# Altium PCB 88路激光器工程.PcbDoc (part 2 of 2)
Units mm, origin at the board's own origin, x right, y up, seen from the top; angles counter-clockwise.
Board outline 290.3 x 80 mm, 2 copper layers (Top Layer, Bottom Layer), stack 1.4 mm thick; 159 components, 203 nets, 686 pads, 305 vias.
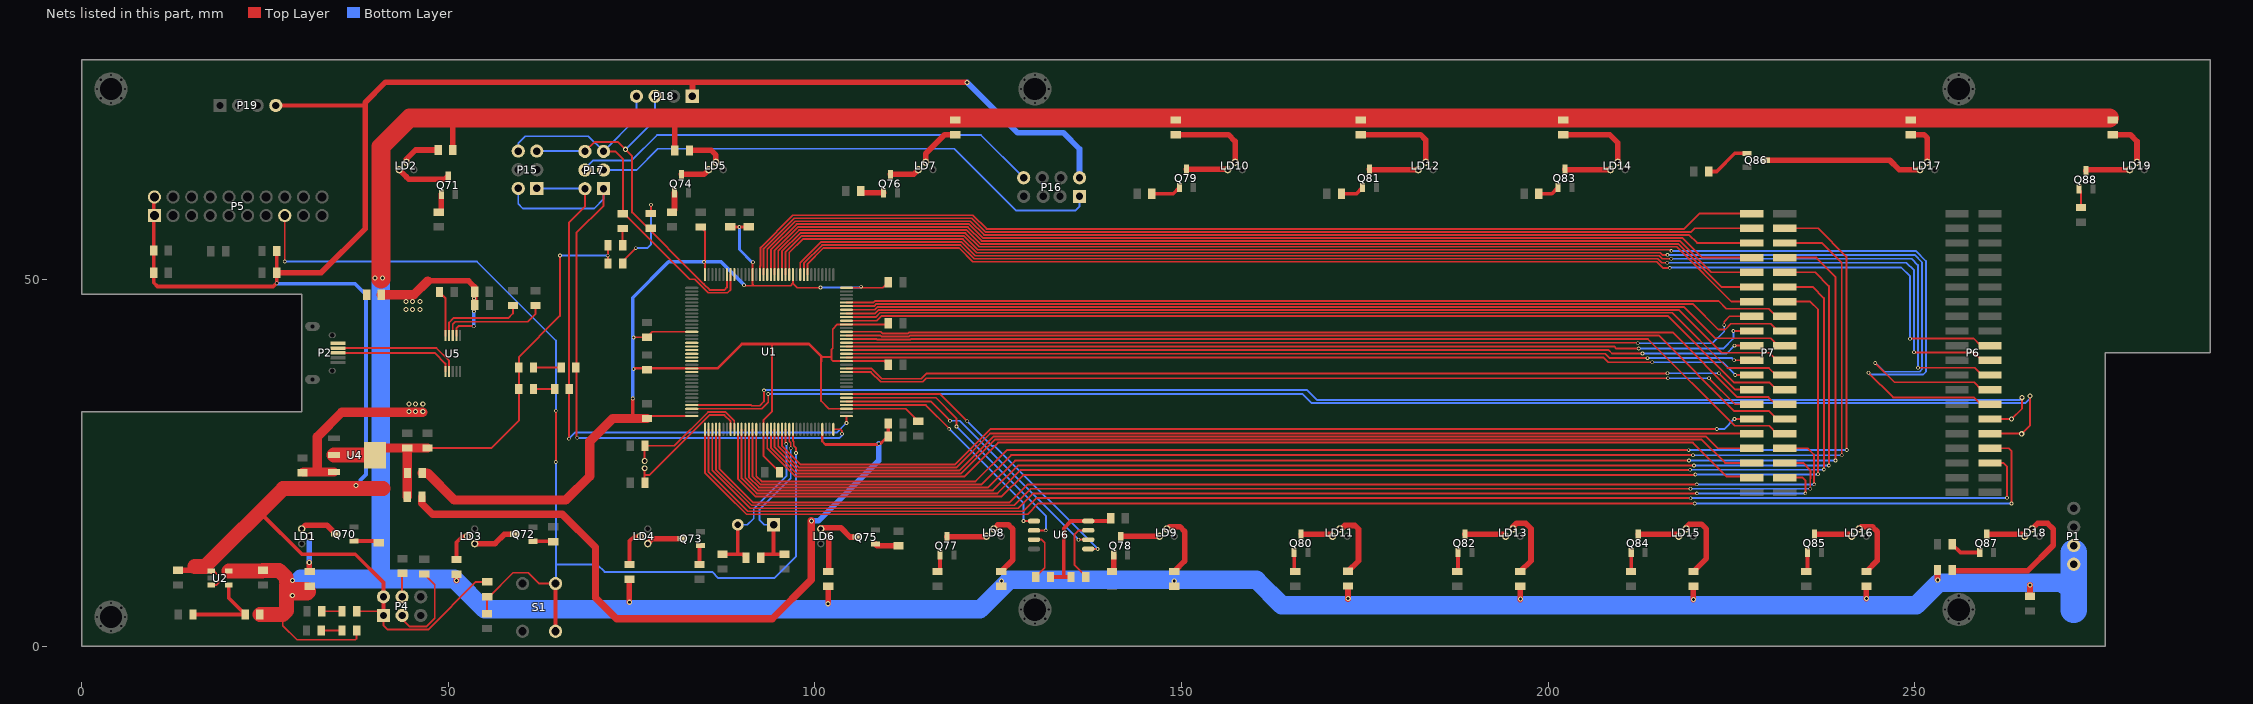
[diagram p2: the nets of this part, all layers, seen from the top]

## Via types
v1: diameter 0.5, hole 0.3, Top Layer to Bottom Layer, tented both sides, 216 vias
v2: diameter 0.7, hole 0.4, Top Layer to Bottom Layer, tented both sides, 87 vias
v3: diameter 1.27, hole 0.711, Top Layer to Bottom Layer, tented both sides, 2 vias

## Nets (pads, with @x,y where several pads share a name; then routed paths per layer and width w, separated by ;. In a path a pad name is that pad's centre, name@x,y a point inside that pad or via, vN(x,y) a via of type N, cw(c..) or ccw(c..) an arc to the next point about the centre after c; other vN are vias at no path point) (continued)
LD43: P6.20 U1.80 | length 174.2
  Top Layer w0.254: U1.80@99.001,50.69 99.001,52.175 101.14,54.313 119.685,54.313 121.554,52.444 214.78,52.444 215.624,51.6 v1(216.575,51.6) ; v1@249.375,41.975 258.025,41.975 259,41 P6.20@260.25,41
  Bottom Layer w0.254: v1(216.575,51.6) 216.629,51.654 248.146,51.654 249.35,50.45 v1(249.35,41.925)
LD44: P6.22 U1.81 | length 177.3
  Top Layer w0.254: U1.81@98.501,50.69 98.501,52.25 100.971,54.72 119.853,54.72 121.723,52.851 214.948,52.851 215.499,52.3 v1(216.225,52.3) ; v1@249.925,40.05 258.05,40.05 259.1,39 P6.22@260.25,39
  Bottom Layer w0.254: v1(216.225,52.3) 248.85,52.3 249.9,51.25 249.879,51.229 249.879,40.104 v1(249.875,40.1)
LD45: P6.24 U1.82 | length 180.8
  Top Layer w0.254: U1.82@98.001,50.69 98.001,52.324 100.803,55.126 120.022,55.126 121.891,53.257 215.116,53.257 215.528,52.846 v1(216.771,52.846) ; v1(250.425,37.975) 258.175,37.975 259.15,37 P6.24@260.25,37
  Bottom Layer w0.254: v1(216.771,52.846) 249.554,52.846 250.425,51.975 v1(250.425,37.975)
LD46: P6.26 U1.85 | length 198.3
  Top Layer w0.254: U1.85@96.501,50.69 96.501,53.701 98.333,55.533 120.19,55.533 122.059,53.663 215.285,53.663 215.573,53.375 v1(216.275,53.375) ; v1(244.6,38.625) 247.225,36 258.075,36 259.075,35 P6.26@260.25,35
  Bottom Layer w0.254: v1(216.275,53.375) 249.975,53.375 250.975,52.375 250.975,37.776 250.644,37.446 245.804,37.446 v1@244.613,38.637
LD47: P6.28 U1.86 | length 202.5
  Top Layer w0.254: U1.86@96.001,50.69 96.001,53.776 98.164,55.939 120.358,55.939 122.228,54.07 216.655,54.07 v1(216.8,53.925) ; v1(243.675,37.3) 247.025,33.95 258.05,33.95 259,33 P6.28@260.25,33
  Bottom Layer w0.254: v1(216.8,53.925) 250.125,53.925 251.521,52.529 251.521,37.446 251.114,37.039 243.936,37.039 v1(243.675,37.3)
LD48: P6.30 U1.141 | length 190.3
  Top Layer w0.254: U1.141@83.202,32.89 91.315,32.89 91.399,32.806 92.456,32.806 93.054,33.404 93.054,34.896 v1(93.05,34.9) ; P6.30@260.25,31 v2@263.2,31 ; v2(263.175,30.975) v2@263.2,31 ; v2(264.625,33.9) 264.625,32.425 v2@263.2,31
  Bottom Layer w0.254: v1(93.05,34.9) 93.079,34.929 167.125,34.929 168.493,33.561 264.286,33.561 v2@264.525,33.8
LD49: P6.32 U1.142 | length 195.1
  Top Layer w0.254: U1.142@83.202,32.39 83.212,32.4 92.75,32.4 93.625,33.275 v1(93.625,34.4) ; P6.32@260.25,29 v2@264.6,29 ; v2(264.575,28.975) v2@264.6,29 ; v2(265.725,34.15) 265.725,30.125 v2@264.6,29
  Bottom Layer w0.254: v1(93.625,34.4) 166.525,34.4 167.77,33.155 265.055,33.155 265.725,33.825 v2(265.725,34.15)
LD50: P6.34 U1.1 | length 197.2
  Top Layer w0.254: U1.1@85.001,29.59 85.001,23.674 87.8,20.875 90.671,18.005 129,18.005 130.47,19.475 v1(219.975,19.475) ; P6.34@260.25,27 262.8,27 263.2,26.6 v1@263.2,19.55
  Bottom Layer w0.254: v1(219.975,19.475) v1(263.175,19.475)
LD51: P6.36 U1.2 | length 192.7
  Top Layer w0.254: U1.2@85.501,29.59 85.501,23.749 90.839,18.411 128.425,18.411 130.214,20.2 v1(219.425,20.2) ; P6.36@260.25,25 262.075,25 262.575,24.5 v1(262.575,20.25)
  Bottom Layer w0.254: v1(219.425,20.2) 262.525,20.2 v1(262.575,20.25)
LD52: P7.3 U1.3 | length 162.4
  Top Layer w0.254: U1.3@86.001,29.59 86.001,23.999 91.183,18.817 127.75,18.817 129.783,20.85 v1(220.275,20.85) ; P7.3@232.25,23 234.702,23 235.075,22.627 v1(235.075,20.85)
  Bottom Layer w0.254: v1(220.275,20.85) v1@235.05,20.85
LD53: P7.5 U1.4 | length 164.1
  Top Layer w0.254: U1.4@86.501,29.59 86.501,24.074 91.351,19.224 127.175,19.224 129.426,21.475 v1(219.4,21.475) ; P7.5@232.25,25 234.775,25 235.75,24.025 235.75,22.875 235.746,22.871 v1@235.746,21.504
  Bottom Layer w0.254: v1(219.4,21.475) v1(235.725,21.475)
LD54: P7.7 U1.5 | length 166
  Top Layer w0.254: U1.5@87.001,29.59 87.001,24.149 91.52,19.63 126.575,19.63 129.02,22.075 v1(220.25,22.075) ; P7.7@232.25,27 235.4,27 236.25,26.15 v1@236.25,22.1
  Bottom Layer w0.254: v1(220.25,22.075) v1(236.275,22.075)
LD55: P7.9 U1.58 | length 133.3
  Top Layer w0.254: U1.58@104.301,41.89 108.436,41.89 108.475,41.851 113.036,41.851 113.075,41.89 213.61,41.89 225.425,30.075 230.125,30.075 231.2,29 P7.9@232.25,29
LD56: P7.11 U1.59 | length 132.8
  Top Layer w0.254: U1.59@104.301,42.39 108.912,42.39 109.044,42.258 112.868,42.258 113,42.39 215.085,42.39 225.4,32.075 230.125,32.075 231.2,31 P7.11@232.25,31
LD57: P7.13 U1.60 | length 132.2
  Top Layer w0.254: U1.60@104.301,42.89 108.987,42.89 109.213,42.664 112.7,42.664 112.832,42.796 216.955,42.796 225.776,33.975 230.025,33.975 231,33 P7.13@232.25,33
LD58: P7.15 U1.63 | length 132.4
  Top Layer w0.254: U1.63@104.301,44.39 108.44,44.39 109.1,45.05 216.3,45.05 225.4,35.95 230.2,35.95 231.15,35 P7.15@232.25,35
LD59: P7.17 U1.64 | length 131.7
  Top Layer w0.254: U1.64@104.301,44.89 108.29,44.89 108.875,45.475 216.925,45.475 224.45,37.95 230.1,37.95 231.05,37 P7.17@232.25,37
LD60: P7.19 U1.65 | length 131
  Top Layer w0.254: U1.65@104.301,45.39 108.215,45.39 108.707,45.881 217.819,45.881 223.675,40.025 230.175,40.025 231.2,39 P7.19@232.25,39
LD61: P7.21 U1.66 | length 130.3
  Top Layer w0.254: U1.66@104.301,45.89 108.141,45.89 108.538,46.288 218.462,46.288 222.75,42 230.35,42 231.35,41 P7.21@232.25,41
LD62: P7.23 U1.67 | length 130.2
  Top Layer w0.254: U1.67@104.301,46.39 108.066,46.39 108.37,46.694 219.706,46.694 223.2,43.2 224.15,43.2 224.925,43.975 230.325,43.975 231.3,43 P7.23@232.25,43
LD63: P7.25 U1.68 | length 128.9
  Top Layer w0.254: U1.68@104.301,46.89 107.991,46.89 ; 107.975,46.874 107.991,46.89 ; P7.25@232.25,45 231.075,45 230.05,46.025 224.3,46.025 223.224,47.101 108.202,47.101 107.991,46.89
LD64: P7.27 U1.10 | length 183.8
  Top Layer w0.254: U1.10@89.501,29.59 89.501,22.823 91.882,20.443 125.475,20.443 128.382,23.35 v1@220.1,23.35 ; P7.27@232.25,47 235.725,47 236.8,45.925 v1(236.8,23.45)
  Bottom Layer w0.254: v1(220.075,23.425) 236.775,23.425 v1(236.8,23.45)
LD65: P7.29 U1.11 | length 185.8
  Top Layer w0.254: U1.11@90.001,29.59 90.001,22.898 92.05,20.849 124.9,20.849 128.101,24.05 v1@219.325,24.05 ; P7.29@232.25,49 236.075,49 237.6,47.475 v1(237.6,24.1)
  Bottom Layer w0.254: v1(219.35,24.075) 237.575,24.075 v1(237.6,24.1)
LD66: P7.31 U1.12 | length 187.8
  Top Layer w0.254: U1.12@90.501,29.59 90.501,22.973 92.218,21.256 124.275,21.256 127.669,24.65 v1(219.875,24.65) ; P7.31@232.25,51 236.4,51 238.275,49.125 v1(238.275,24.65)
  Bottom Layer w0.254: v1(219.875,24.65) v1(238.275,24.65)
LD67: P7.33 U1.13 | length 189.9
  Top Layer w0.254: U1.13@91.001,29.59 91.001,23.048 92.387,21.662 123.625,21.662 127.288,25.325 v1(219.2,25.325) ; P7.33@232.25,53 236.575,53 239.175,50.4 v1(239.175,25.325)
  Bottom Layer w0.254: v1(219.2,25.325) v1(239.175,25.325)
LD68: P7.35 U1.14 | length 192.2
  Top Layer w0.254: U1.14@91.501,29.59 91.501,23.124 92.556,22.069 122.75,22.069 126.756,26.075 v1@219.75,26.075 ; P7.35@232.25,55 237.3,55 240.025,52.275 v1(240.025,26.05)
  Bottom Layer w0.254: v1(219.75,26.05) v1(240.025,26.05)
LD69: P7.37 U1.15 | length 193.9
  Top Layer w0.254: U1.15@92.001,29.59 92.001,23.198 92.725,22.475 121.9,22.475 126.175,26.75 v1(219.15,26.75) ; P7.37@232.25,57 236.825,57 240.675,53.15 240.675,26.825 v1(240.725,26.775)
  Bottom Layer w0.254: v1(219.15,26.75) 240.85,26.75 240.825,26.775 v1(240.725,26.775)
LD70: P7.4 U1.18 | length 142.3
  Top Layer w0.254: U1.18@93.501,29.59 93.501,27.024 97.376,23.149 120.35,23.149 124.981,27.781 219.744,27.781 224.375,23.149 227.601,23.149 P7.4@227.75,23
LD71: P7.6 U1.19 | length 140.9
  Top Layer w0.254: U1.19@94.001,29.59 94.001,27.098 97.544,23.556 119.9,23.556 124.531,28.187 220.938,28.187 224.125,25 P7.6@227.75,25
LD72: P7.8 U1.20 | length 139.6
  Top Layer w0.254: U1.20@94.501,29.59 94.501,27.173 97.712,23.962 119.7,23.962 124.331,28.594 221.556,28.594 223.15,27 P7.8@227.75,27
LD73: P7.10 U1.21 | length 138.2
  Top Layer w0.254: U1.21@95.001,29.59 95.001,27.248 97.881,24.369 119.243,24.369 123.875,29 P7.10@227.75,29
LD74: P7.12 U1.22 | length 138.1
  Top Layer w0.254: U1.22@95.501,29.59 95.501,27.322 98.049,24.775 119.075,24.775 123.925,29.625 v1(222.975,29.625) ; v1(225.4,31) P7.12@227.75,31
  Bottom Layer w0.254: v1(222.975,29.625) 224.025,29.625 v1(225.4,31)
LD75: P7.14 U1.49 | length 125.7
  Top Layer w0.254: U1.49@104.301,37.39 107.635,37.39 108.95,36.075 114.675,36.075 115.15,36.55 v1(216.325,36.55) ; v1(221.925,36.55) 225.475,33 P7.14@227.75,33
  Bottom Layer w0.254: v1(216.325,36.55) v1(221.925,36.55)
LD76: P7.16 U1.50 | length 125.3
  Top Layer w0.254: U1.50@104.301,37.89 107.71,37.89 109.118,36.481 114.507,36.481 115.232,37.206 v1@216.35,37.206 ; v1(223.275,37.225) 225.5,35 P7.16@227.75,35
  Bottom Layer w0.254: v1(216.275,37.225) v1(223.275,37.225)
LD77: P7.18 U1.53 | length 124.4
  Top Layer w0.254: U1.53@104.301,39.39 207.525,39.39 208.19,38.725 v1(214.2,38.725) ; v1(225.5,37) P7.18@227.75,37
  Bottom Layer w0.254: v1(214.2,38.725) 223.775,38.725 v1(225.5,37)
LD78: P7.20 U1.54 | length 123.8
  Top Layer w0.254: U1.54@104.301,39.89 207.81,39.89 208.4,39.3 v1(213.55,39.3) ; v1(225.35,39) P7.20@227.75,39
  Bottom Layer w0.254: v1(213.55,39.3) 225.05,39.3 v1(225.35,39)
LD79: P7.22 U1.55 | length 124.1
  Top Layer w0.254: U1.55@104.301,40.39 208.235,40.39 208.7,39.925 v1(212.85,39.925) ; v1(225.4,41) P7.22@227.75,41
  Bottom Layer w0.254: v1(212.85,39.925) 224.325,39.925 v1(225.4,41)
LD80: P7.24 U1.56 | length 125.2
  Top Layer w0.254: U1.56@104.301,40.89 208.985,40.89 209.275,40.6 v1(212.35,40.6) ; v1(225.25,43) P7.24@227.75,43
  Bottom Layer w0.254: v1(212.35,40.6) 223.875,40.6 225.25,41.975 v1(225.25,43)
LD81: P7.26 U1.57 | length 125.7
  Top Layer w0.254: U1.57@104.301,41.39 v1@212.2,41.39 ; v1(224,43.8) 224,44.275 224.725,45 P7.26@227.75,45
  Bottom Layer w0.254: v1(212.225,41.325) 222.4,41.325 224,42.925 v1(224,43.8)
LD82: P7.28 U1.87 | length 140.3
  Top Layer w0.254: U1.87@95.501,50.69 95.501,53.851 97.996,56.345 120.527,56.345 122.396,54.476 217.524,54.476 225,47 P7.28@227.75,47
LD83: P7.30 U1.88 | length 140.4
  Top Layer w0.254: U1.88@95.001,50.69 95.001,53.926 97.828,56.752 120.695,56.752 122.564,54.883 217.742,54.883 223.625,49 P7.30@227.75,49
LD84: P7.32 U1.89 | length 140.4
  Top Layer w0.254: U1.89@94.501,50.69 94.501,54 97.659,57.158 120.863,57.158 122.733,55.289 217.936,55.289 222.225,51 P7.32@227.75,51
LD85: P7.34 U1.90 | length 140.5
  Top Layer w0.254: U1.90@94.001,50.69 94.001,54.075 97.491,57.565 121.032,57.565 122.901,55.695 218.305,55.695 221,53 P7.34@227.75,53
LD86: P7.36 U1.91 | length 140.5
  Top Layer w0.254: U1.91@93.501,50.69 93.501,54.15 97.323,57.971 121.2,57.971 123.069,56.102 219.198,56.102 220.3,55 P7.36@227.75,55
LD87: P7.38 U1.92 | length 141
  Top Layer w0.254: U1.92@93.001,50.69 93.001,54.224 97.154,58.377 121.368,58.377 123.238,56.508 219.508,56.508 220,57 P7.38@227.75,57
LD88: P7.40 U1.93 | length 142.4
  Top Layer w0.254: U1.93@92.501,50.69 92.501,51.795 92.582,51.875 92.582,54.38 96.986,58.784 121.537,58.784 123.406,56.915 218.54,56.915 220.625,59 P7.40@227.75,59
MCU_RX1: D6.2 P15.3 P17.6 P18.3 U1.102 | length 50.1
  Top Layer w0.254: P17.6@68.635,67.49 69.905,68.76 73.165,68.76 75.075,66.85 75.075,59.175 84.863,49.387 85.641,48.609 87.671,48.609 88.001,48.939 U1.102@88.001,50.69
  Bottom Layer w0.254: P15.3@62.075,67.525 68.6,67.525 P17.6@68.635,67.49 ; v2(74.175,67.775) 78.2,71.8 P18.3@78.2,75
MCU_RX2: D4.2 P15.1 P17.2 U1.37 | length 81.2
  Top Layer w0.254: v1(66.45,28.3) 66.45,57.775 68.635,59.96 P17.2@68.635,62.41 ; v1@104.301,30.474 U1.37@104.301,31.39
  Bottom Layer w0.254: P15.1@62.075,62.445 68.6,62.445 P17.2@68.635,62.41 ; v1@66.45,28.325 67.275,29.15 103.003,29.15 v1(104.301,30.449)
MCU_TX1: D5.2 P15.6 P17.5 P18.4 U1.101 | length 55.1
  Top Layer w0.254: P17.5@71.175,67.49 72.76,67.49 73.85,66.4 73.85,59.125 82.925,50.05 83.625,50.05 85.472,48.203 88.078,48.203 88.501,48.626 U1.101@88.501,50.69
  Bottom Layer w0.254: P15.6@59.535,67.525 59.535,68.585 60.5,69.55 69.115,69.55 P17.5@71.175,67.49 75.66,71.975 P18.4@75.66,75
MCU_TX2: D3.2 P15.4 P17.1 U1.36 | length 89.8
  Top Layer w0.254: v1(67.6,28.425) 67.471,28.554 67.471,56.371 71.175,60.075 P17.1@71.175,62.41 ; U1.36@102.501,29.59 103.46,29.59 103.7,29.35 v1(103.7,28.98)
  Bottom Layer w0.254: P15.4@59.535,62.445 59.535,60.34 60.175,59.7 69.875,59.7 71.175,61 P17.1@71.175,62.41 ; v1(67.6,28.425) 103.375,28.425 103.815,28.865 v1(103.7,28.98)
NetC3_2: C3.2 R139.1 U1.24 Y1.1 | length 23.9
  Top Layer w0.254: U1.24@96.501,29.59 96.501,27.947 96.7,27.749 v1(96.7,27)
  Top Layer w0.508: R139.1@92.603,12.075 93.082,12.553 94.425,12.553 ; Y1.1@94.363,16.575 94.363,12.615 94.425,12.553 ; C3.2@95.85,12.553 94.425,12.553
  Bottom Layer w0.254: Y1.1@94.363,16.575 93.1,16.575 92.425,17.25 92.425,18.625 96.7,22.9 v1(96.7,27)
NetC4_2: C4.2 R139.2 U1.23 Y1.2 | length 24
  Top Layer w0.254: U1.23@96.001,29.59 96.001,27.699 v1(96.1,27.6)
  Top Layer w0.508: C4.2@87.4,12.553 89.5,12.553 ; Y1.2@89.487,16.575 89.487,12.567 89.5,12.553 ; R139.2@90.597,12.075 90.118,12.553 89.5,12.553
  Bottom Layer w0.254: Y1.2@89.487,16.575 90.8,16.575 91.65,17.425 91.65,18.738 96.1,23.188 v1(96.1,27.6)
NetC16_2: C16.2 U1.8 Y2.1 | length 19
  Top Layer w0.254: Y2.1@76.775,24.275 76.775,23.3 ; C16.2@76.828,22.768 C16.2@76.828,22.3 76.775,22.353 76.775,23.3 ; U1.8@88.501,29.59 88.501,30.674 87.65,31.525 85.585,31.525 77.41,23.35 76.825,23.35 76.775,23.3
NetC17_2: C17.2 U1.9 Y2.2 | length 17.8
  Top Layer w0.254: Y2.2@76.775,25.275 76.775,27.35 80.836,27.35 85.417,31.931 87.818,31.931 89.001,30.748 U1.9@89.001,29.59
NetC25_2: C25.2 U5.10 | length 6.3
  Top Layer w0.305: C25.2@48.799,48.315 49.602,47.511 U5.10@49.602,42.358
NetD1_1: D1.1 R9.2 | length 2.8
  Top Layer w0.254: D1.1@32.678,2.15 R9.2@35.5,2.15
NetD2_1: D2.1 R6.2 | length 2.8
  Top Layer w0.254: D2.1@32.728,4.775 R6.2@35.497,4.775
NetD3_1: D3.1 R194.2 | length 3.8
  Top Layer w0.254: R194.2@61.628,38.025 D3.1@65.397,38.025
NetD4_1: D4.1 R195.2 | length 2.9
  Top Layer w0.254: R195.2@61.628,35.1 D4.1@64.497,35.1
NetD5_1: D5.1 R196.2 | length 2.3
  Top Layer w0.254: R196.2@73.778,54.7 73.778,56.95 D5.1@73.8,56.972
NetD6_1: D6.1 R197.2 | length 11.7
  Top Layer w0.254: R197.2@73.778,52.2 73.778,52.503 v1(75.575,54.3) ; D6.1@77.625,59.028 v1@77.625,60.225
  Bottom Layer w0.254: v1(75.575,54.3) 77.125,54.3 77.65,54.825 v1(77.65,60.2)
NetLD1_1: LD1.1 R18.1 | length 4.8
  Top Layer w0.762: v2(31.041,11.441) 31.041,10.262 R18.1@31.1,10.203
  Bottom Layer w0.762: LD1.1@31.008,15 31.041,14.967 v2(31.041,11.441)
NetLD1_2: LD1.2 Q70.3 | length 5.4
  Top Layer w0.762: LD1.2@30,16 30.525,16.525 33.425,16.525 Q70.3@34.65,15.3
NetLD2_1: LD2.1 R20.1 | length 5.3
  Top Layer w0.762: LD2.1@44.3,66 44.3,66.425 45.55,67.675 R20.1@48.622,67.675
NetLD2_2: LD2.2 Q71.3 | length 7.4
  Top Layer w0.762: LD2.2@43.3,65 44.3,64 44.308,64 44.616,63.691 49.542,63.691 Q71.3@50,64.15
NetLD3_1: LD3.1 R22.1 | length 4.2
  Top Layer w0.508: R22.1@51.125,11.828 51.125,14.175 51.95,15 LD3.1@52.6,15
NetLD3_2: LD3.2 Q72.3 | length 6
  Top Layer w0.762: LD3.2@53.6,14 56.375,14 57.65,15.275 Q72.3@59.05,15.275
NetLD4_1: LD4.1 R24.1 | length 5
  Top Layer w0.508: R24.1@74.7,11.153 74.7,14.35 75.35,15 LD4.1@76.2,15
NetLD4_2: LD4.2 Q73.3 | length 5
  Top Layer w0.762: LD4.2@77.2,14 77.875,14.675 Q73.3@81.875,14.675 ; LD4.2@77.208,13.967 LD4.2@77.208,14
NetLD5_1: LD5.1 R26.1 | length 4.9
  Top Layer w0.762: R26.1@82.903,67.625 85.875,67.625 86.5,67 LD5.1@86.5,66
NetLD5_2: LD5.2 Q74.3 | length 4
  Top Layer w0.762: Q74.3@81.8,64.35 84.85,64.35 LD5.2@85.5,65
NetLD6_1: LD6.1 R28.1 | length 4.9
  Top Layer w0.762: R28.1@101.8,10.203 101.9,10.303 101.9,14.9 LD6.1@101.8,15
NetLD6_2: LD6.2 Q75.3 | length 5.6
  Top Layer w0.762: LD6.2@100.8,16 100.8,16.16 103.54,16.16 104.8,14.9 Q75.3@105.75,14.9
NetLD7_1: LD7.1 R30.1 | length 6.3
  Top Layer w0.762: LD7.1@115.1,66 115.1,67.172 117.7,69.772 R30.1@119.15,69.772
NetLD7_2: LD7.2 Q76.3 | length 4.1
  Top Layer w0.762: Q76.3@110.3,64.35 113.45,64.35 LD7.2@114.1,65
NetLD8_1: LD8.1 R32.1 | length 9.5
  Top Layer w0.762: LD8.1@124.4,16 124.95,16.55 126.4,16.55 126.975,15.975 126.975,11.778 R32.1@125.4,10.203
NetLD8_2: LD8.2 Q77.3 | length 5.4
  Top Layer w0.762: Q77.3@118,14.95 123.35,14.95 LD8.2@123.4,15
NetLD9_1: LD9.1 R34.1 | length 8.9
  Top Layer w0.762: LD9.1@148,16 148.05,16 148.362,16.312 149.762,16.312 150.425,15.65 150.425,11.628 R34.1@149,10.203
NetLD9_2: LD9.2 Q78.3 | length 5.3
  Top Layer w0.762: Q78.3@141.7,14.95 141.75,15 LD9.2@147,15
NetLD10_1: LD10.1 R36.1 | length 11.3
  Top Layer w0.762: R36.1@149.2,69.772 156.378,69.772 157.3,68.85 LD10.1@157.3,66
NetLD10_2: LD10.2 Q79.3 | length 5.7
  Top Layer w0.762: Q79.3@150.65,65.05 156.25,65.05 LD10.2@156.3,65
NetLD11_1: LD11.1 R38.1 | length 9.4
  Top Layer w0.762: LD11.1@171.6,16 171.775,16 172.25,16.475 173.625,16.475 174.125,15.975 174.125,11.654 R38.1@172.7,10.229 R38.1@172.608,10.321
NetLD11_2: LD11.2 Q80.3 | length 4.4
  Top Layer w0.762: Q80.3@166.3,15.275 170.325,15.275 LD11.2@170.6,15
NetLD12_1: LD12.1 R40.1 | length 12.2
  Top Layer w0.762: R40.1@174.425,69.772 182.578,69.772 183.3,69.05 LD12.1@183.3,66
NetLD12_2: LD12.2 Q81.3 | length 6.7
  Top Layer w0.762: Q81.3@175.625,65.05 175.675,65 LD12.2@182.3,65
NetLD13_1: LD13.1 R42.1 | length 9.6
  Top Layer w0.762: LD13.1@195.2,16 195.2,16.3 195.675,16.775 196.925,16.775 197.65,16.05 197.65,11.653 R42.1@196.241,10.245
NetLD13_2: LD13.2 Q82.3 | length 5.7
  Top Layer w0.762: Q82.3@188.65,15.275 193.925,15.275 LD13.2@194.2,15
NetLD14_1: LD14.1 R44.1 | length 10.6
  Top Layer w0.762: R44.1@202.05,69.772 208.378,69.772 209.5,68.65 LD14.1@209.5,66
NetLD14_2: LD14.2 Q83.3 | length 6.2
  Top Layer w0.762: Q83.3@202.275,65.05 202.325,65 LD14.2@208.5,65
NetLD15_1: LD15.1 R46.1 | length 9.9
  Top Layer w0.762: LD15.1@218.8,16 218.8,16.2 219.25,16.65 220.9,16.65 221.575,15.975 221.575,11.978 R46.1@219.8,10.203
NetLD15_2: LD15.2 Q84.3 | length 5.6
  Top Layer w0.762: Q84.3@212.275,15.275 217.525,15.275 LD15.2@217.8,15
NetLD16_1: LD16.1 R48.1 | length 8.9
  Top Layer w0.762: LD16.1@242.4,16 242.675,16.275 244.225,16.275 244.875,15.625 244.875,11.678 R48.1@243.4,10.203
NetLD16_2: LD16.2 Q85.3 | length 5.2
  Top Layer w0.762: Q85.3@236.325,15.275 241.125,15.275 LD16.2@241.4,15
NetLD17_1: LD17.1 R50.1 | length 5.8
  Top Layer w0.762: R50.1@249.425,69.772 251.228,69.772 251.7,69.3 LD17.1@251.7,66
NetLD17_2: LD17.2 Q86.3 | length 21.6
  Top Layer w0.762: Q86.3@229.625,66.275 246.575,66.275 247.85,65 LD17.2@250.7,65
NetLD18_1: LD18.1 R52.1 | length 21
  Top Layer w0.762: R52.1@255.103,10.4 255.211,10.292 265.392,10.292 268.875,13.775 268.875,15.975 268.1,16.75 266.75,16.75 LD18.1@266,16
NetLD18_2: LD18.2 Q87.3 | length 5.3
  Top Layer w0.762: Q87.3@259.8,15.275 264.725,15.275 LD18.2@265,15
NetLD19_1: LD19.1 R54.1 | length 6.5
  Top Layer w0.762: R54.1@277,69.772 279.378,69.772 280.3,68.85 LD19.1@280.3,66
NetLD19_2: LD19.2 Q88.3 | length 6
  Top Layer w0.762: Q88.3@273.325,64.85 273.45,64.975 279.275,64.975 LD19.2@279.3,65
NetP4_3: P4.3 R11.2 | length 12.5
  Top Layer w0.254: P4.3@43.7,4.2 43.7,3.7 44.719,2.681 46.994,2.681 48.15,3.838 48.15,8.422 R11.2@46.725,9.847
NetP4_4: P4.4 R12.1 | length 3.2
  Top Layer w0.254: P4.4@43.7,6.74 43.7,9.897 R12.1@43.75,9.947
NetQ70_1: Q70.1 R19.1 | length 3.5
  Top Layer w0.508: Q70.1@37.15,14.35 40.247,14.35 R19.1@40.5,14.097
NetQ71_1: Q71.1 R21.1 | length 2.6
  Top Layer w0.762: R21.1@48.7,59.203 49.05,59.553 Q71.1@49.05,61.65
NetQ72_1: Q72.1 R23.1 | length 2.8
  Top Layer w0.508: Q72.1@61.55,14.325 R23.1@64.272,14.325
  Top Layer w0.762: R23.1@64.272,14.325 R23.1@64.325,14.272
NetQ73_1: Q73.1 R25.1 | length 2.6
  Top Layer w0.508: R25.1@84.25,11.153 84.25,13.6 Q73.1@84.375,13.725
NetQ74_1: Q74.1 R27.1 | length 2.8
  Top Layer w0.762: R27.1@80.5,59.203 80.85,59.553 Q74.1@80.85,61.85
NetQ75_1: Q75.1 R29.1 | length 3.3
  Top Layer w0.762: Q75.1@108.25,13.95 108.503,13.697 R29.1@111.4,13.697
NetQ76_1: Q76.1 R31.1 | length 3.2
  Top Layer w0.762: R31.1@106.228,62.1 106.478,61.85 Q76.1@109.35,61.85
NetQ77_1: Q77.1 R33.1 | length 2.4
  Top Layer w0.508: R33.1@116.7,10.203 117.05,10.553 Q77.1@117.05,12.45
NetQ78_1: Q78.1 R35.1 | length 2.4
  Top Layer w0.762: R35.1@140.5,10.203 140.75,10.453 Q78.1@140.75,12.45
NetQ79_1: Q79.1 R37.1 | length 4.1
  Top Layer w0.508: R37.1@145.953,61.725 148.875,61.725 Q79.1@149.7,62.55
NetQ80_1: Q80.1 R39.1 | length 2.6
  Top Layer w0.508: Q80.1@165.35,12.775 165.35,10.353 R39.1@165.5,10.203
NetQ81_1: Q81.1 R41.1 | length 3.4
  Top Layer w0.508: R41.1@171.803,61.725 173.85,61.725 Q81.1@174.675,62.55 ; Q81.1@174.575,62.65 Q81.1@174.675,62.75
NetQ82_1: Q82.1 R43.1 | length 2.6
  Top Layer w0.508: R43.1@187.7,10.303 Q82.1@187.7,12.775
  Top Layer w0.762: R43.1@187.6,10.203 R43.1@187.7,10.303
NetQ83_1: Q83.1 R45.1 | length 3
  Top Layer w0.508: R45.1@198.728,61.725 200.5,61.725 Q83.1@201.325,62.55 ; Q83.1@201.288,62.588 Q83.1@201.325,62.625
NetQ84_1: Q84.1 R47.1 | length 2.6
  Top Layer w0.508: R47.1@211.3,10.203 211.325,10.228 Q84.1@211.325,12.775
NetQ85_1: Q85.1 R49.1 | length 2.6
  Top Layer w0.508: R49.1@235.2,10.203 235.375,10.378 Q85.1@235.375,12.775
NetQ86_1: Q86.1 R51.1 | length 6.3
  Top Layer w0.508: R51.1@221.878,64.75 222.975,64.75 225.45,67.225 Q86.1@227.125,67.225
NetQ87_1: Q87.1 R53.1 | length 4.2
  Top Layer w0.508: R53.1@255.103,13.9 256.228,12.775 Q87.1@258.85,12.775
NetQ88_1: Q88.1 R55.1 | length 2.6
  Top Layer w0.254: Q88.1@272.375,62.35 272.65,62.075 R55.1@272.65,59.828
NetR2_2: R2.2 U5.9 | length 12.1
  Top Layer w0.254: U5.9@50.102,42.358 50.102,44.152 50.7,44.75 58.175,44.75 58.825,45.4 R2.2@58.825,46.472
NetR3_2: R3.2 U5.8 | length 14.5
  Top Layer w0.254: U5.8@50.602,42.358 50.602,43.927 50.938,44.263 60.813,44.263 61.9,45.35 R3.2@61.9,46.397
NetR4_2: R4.2 U6.3 | length 6.8
  Top Layer w0.254: U6.3@129.875,14.54 130.935,14.54 131.35,14.125 131.35,10.678 R4.2@130.122,9.45
NetR5_1: R5.1 U6.7 | length 8.4
  Top Layer w0.254: R5.1@136.928,9.55 135.421,11.058 135.421,15.246 135.985,15.81 U6.7@137.275,15.81
NetR7_1: R7.1 R8.2 U2.4 | length 12.1
  Top Layer w0.508: R8.2@15.175,4.325 R7.1@22.3,4.325 20.075,6.55 U2.4@20.075,8.35
PA4: U1.40 U6.1 | length 33.6
  Top Layer w0.254: U1.40@104.301,32.89 115.135,32.89 v1@118.35,29.675 ; v1(128.45,17.075) 128.455,17.08 U6.1@129.875,17.08
  Bottom Layer w0.254: v1(118.3,29.65) 128.45,19.5 v1(128.45,17.075)
PA5: U1.41 U6.6 | length 40.8
  Top Layer w0.254: U1.41@104.301,33.39 115.81,33.39 v1@118.437,30.762 ; v1(135.95,14.525) 135.95,14.53 135.96,14.54 U6.6@137.275,14.54
  Bottom Layer w0.254: v1(118.425,30.75) 119.75,30.75 v1@135.925,14.575
PA6: U1.42 U6.2 | length 38.2
  Top Layer w0.254: U1.42@104.301,33.89 116.51,33.89 119.3,31.1 v1(119.3,29.975) ; U6.2@129.875,15.81 131.465,15.81 v1(131.475,15.8)
  Bottom Layer w0.254: v1(119.3,29.975) 131.5,17.775 v1@131.5,15.75
PA7: U1.43 U6.5 | length 44.3
  Top Layer w0.254: U1.43@104.301,34.39 117.085,34.39 v1(120.775,30.7) ; U6.5@137.275,13.27 138.545,13.27 v1(138.55,13.275)
  Bottom Layer w0.254: v1(120.775,30.7) 124.175,27.3 124.525,27.3 v1(138.55,13.275)
PA8: U1.100
PG9: U1.124
PG10: U1.125
PG11: U1.126
PG12: U1.127
PG13: U1.128
PG14: U1.129
PG15: U1.132
RESET: C24.1 P5.15 R10.1 S1.1 U1.25 | length 153.2
  Top Layer w0.254: v1(27.7,52.475) P5.15@27.7,58.73 ; C24.1@55.275,4.428 R10.1@55.275,6.747 ; R10.1@55.3,6.772 55.572,6.772 58.825,10.025 60.925,10.025 62.399,8.551 S1.1@64.625,8.551 ; v1(64.65,25.125) 64.675,25.15 v1(64.675,32.125) ; U1.25@97.001,29.59 97.001,28.022 97.106,27.917 97.106,27.342 97.425,27.024 v1(97.425,26.35)
  Top Layer w0.508: S1.1@64.625,2.049 S1.1@64.625,8.551
  Top Layer w1.016: R10.1@55.275,6.747 R10.1@55.3,6.772
  Bottom Layer w0.254: v1(27.7,52.475) 53.9,52.475 64.675,41.7 v1(64.675,32.125) ; S1.1@64.625,8.551 64.7,8.626 64.7,11.128 ; v1@64.7,25.125 64.7,11.128 ; v1(97.425,26.35) 97.425,12.3 94.425,9.3 86.806,9.3 85.969,10.138 71.319,10.138 70.328,11.128 64.7,11.128
USB5V: P2.1 R1.2
USB_DN: P2.2 U5.2 | length 17.3
  Top Layer w0.254: P2.2@34.961,40.66 48.39,40.66 50.102,38.948 U5.2@50.102,37.456
USB_DP: P2.3 U5.1 | length 16.3
  Top Layer w0.254: P2.3@34.961,40.01 48.14,40.01 49.602,38.548 U5.1@49.602,37.456
VCC: C21.2 C26.2 C27.2 R1.1 U4.3 U5.7 | length 48.3
  Top Layer w0.305: U5.7@51.102,42.358 51.102,43.352 51.425,43.675 v1@53.525,43.675
  Top Layer w0.762: 47.2,49.825 52.775,49.825 53.587,49.013 C26.2@53.587,48.365 53.587,46.711 C27.2@53.612,46.685
  Top Layer w1.27: C21.2@30.228,23.775 32.15,23.775 ; U4.3@34.425,23.775 32.15,23.775 ; R1.1@40.878,47.925 45.3,47.925 47.2,49.825 ; v2@46.525,31.9 35.475,31.9 32.15,28.575 32.15,23.775
  Bottom Layer w0.508: v1(53.475,43.65) v1@53.475,47.45
  other v1: 53.5,45.675 53.5,47.425
  other v2: 44.625,32 45.525,32 46.525,32 44.625,33.05 45.525,33.05 46.525,33.05 44.225,45.925 45.125,45.925 46.125,45.925 44.225,47 45.125,47 46.125,47
VCC2.5: C18.2 C20.2 P1.1 P1.2 R7.2 R9.1 R18.2 R20.2 R22.2 R24.2 R26.2 R28.2 R30.2 R32.2 R34.2 R36.2 R38.2 R40.2 R42.2 R44.2 R46.2 R48.2 R50.2 R52.2 R54.2 U2.5 | length 607.8
  Top Layer w0.254: 27.425,4.325 27.425,2.825 29.368,0.882 37.338,0.882 37.507,1.05 R9.1@37.507,2.15 37.507,2.168 R9.1@37.5,2.175
  Top Layer w0.762: C20.2@24.622,10.25 C20.2@24.725,10.353 ; R20.2@50.628,67.675 50.628,71.953 50.725,72.05 ; v2(51.125,8.95) R22.2@51.125,9.822 ; v2(74.7,6) R24.2@74.7,9.147 ; 80.75,72.05 80.897,71.903 R26.2@80.897,67.625 ; v2(101.8,5.8) R28.2@101.8,8.197 ; v2@172.7,6.4 R38.2@172.7,8.222 ; v2@196.2,6.325 R42.2@196.2,8.197 ; v2(219.8,6.375) R46.2@219.8,8.197 ; v2(243.4,6.5) R48.2@243.4,8.197 ; v2@253.097,9.103 R52.2@253.097,10.4 ; C18.2@265.7,6.828 v2@265.7,8.4
  Top Layer w2.032: U2.5@20.075,10.25 C20.2@24.622,10.25 ; R7.2@24.307,4.325 27.425,4.325 27.947,4.847 27.947,8.197 ; C20.2@24.725,10.353 26.922,10.353 27.9,9.375 27.9,8.85
  Top Layer w2.54: 29.15,7.497 30.7,7.497 ; v2@40.825,50.047 40.825,68.125 44.75,72.05 50.725,72.05 80.75,72.05 R54.2@276.55,72.05
  Bottom Layer w0.254: v2@28.55,8.95 v2(28.75,8.95)
  Bottom Layer w2.032: 29.5,8.8 29.875,9.175
  Bottom Layer w2.54: 29.875,9.175 40.8,9.175 ; 40.8,49.425 40.8,9.175 ; 270.575,8.175 270.078,8.672 253.247,8.672 250.175,5.6 163.675,5.6 160.225,9.05 126.525,9.05 122.5,5.025 54.95,5.025 50.8,9.175 40.8,9.175
  Bottom Layer w3.556: 271.675,4.95 271.675,12.808
  other v2: 196.225,6.45 172.725,6.525 28.725,6.9 265.725,8.35 125.425,8.9 149,8.925 253.125,9.05 40.025,50.2 41.025,50.2
VCC3.3: C19.2 C22.2 C23.2 P4.1 P4.2 P5.1 P5.2 P16.5 P18.1 P19.4 R6.1 R10.2 R14.1 R15.1 R16.1 R17.1 R140.1 R146.1 R194.1 R195.1 R196.1 R197.1 U2.1 U2.3 U4.2 U4.4 | length 382.7
  Top Layer w0.254: U2.3@17.675,8.35 18.375,8.35 18.65,8.625 18.65,9.7 18.1,10.25 U2.1@17.675,10.25 ; R6.1@37.503,4.775 40.585,4.775 P4.1@41.16,4.2 41.16,2.89 41.775,2.275 47.25,2.275 53.753,8.778 R10.2@55.3,8.778 ; C22.2@47.175,27.047 55.922,27.047 59.622,30.747 R195.1@59.622,35.1 R194.1@59.622,38.025 59.622,39.447 65.225,45.05 v1(65.225,53.3) ; R197.1@71.772,52.2 R196.1@71.772,54.7
  Top Layer w0.508: P5.2@9.92,61.27 9.822,61.172 R14.1@9.822,53.975 R15.1@9.822,50.95 9.822,49.578 10.325,49.075 26.125,49.075 26.603,49.553 R16.1@26.603,50.95 R17.1@26.603,53.9 ; P19.4@26.48,73.75 38.55,73.75 38.65,73.65 ; 27.85,21.5 24.475,18.125 30.05,12.55 37.325,12.55 41.16,8.715 P4.2@41.16,6.74 P4.1@41.16,4.2
  Top Layer w0.762: C19.2@13.125,10.353 17.572,10.353 U2.1@17.675,10.25 ; R16.1@26.603,50.95 32.675,50.95 38.65,56.925 38.65,73.65 38.65,74.125 41.458,76.933 83.3,76.933 ; P18.1@83.28,75 83.3,75.02 83.3,76.933 ; v2@120.675,76.933 83.3,76.933
  Top Layer w1.27: U4.4@40.025,26.075 40.997,27.047 C23.2@44.4,27.047 ; R140.1@44.397,20.4 44.397,27.043 C23.2@44.4,27.047 ; C22.2@47.175,27.047 C23.2@44.4,27.047
  Top Layer w2.032: 15.425,10.9 16.875,10.9 27.475,21.5 27.85,21.5 41.1,21.5 ; U4.2@34.425,26.075 U4.4@40.025,26.075
  Bottom Layer w0.254: v1(65.225,53.3) v1@71.775,53.3
  Bottom Layer w0.508: v1@26.6,49.45 37.275,49.45 38.775,47.95 38.775,23.425 37.975,22.625 38.05,22.55 v2(37.425,21.925)
  Bottom Layer w0.762: v2@120.75,76.925 127.637,70.038 133.887,70.038 136.085,67.84 P16.5@136.085,63.89
  other v1: 26.6,49.5 71.75,53.275
  other v2: 120.725,76.9
VCC3.3M: C5.2 C6.2 C7.2 C8.2 C9.2 C10.2 C11.2 C12.2 C13.2 C14.2 C15.2 R146.2 U1.17 U1.39 U1.52 U1.62 U1.72 U1.84 U1.95 U1.108 U1.121 U1.131 U1.144 | length 219.7
  Top Layer w0.254: v1@75.253,42.147 C5.2@77.1,42.147 77.843,42.89 U1.121@83.202,42.89 ; C14.2@77.1,31.072 77.418,31.39 U1.144@83.202,31.39 ; C6.2@84.425,57.172 85.001,56.595 U1.108@85.001,50.69 ; v1@90.425,49.175 91.675,49.175 ; v1(91.55,52.375) 91.55,52.428 91.501,52.476 U1.95@91.501,50.69 91.501,49.349 91.675,49.175 ; 94.05,41.225 94.154,41.121 94.154,32.029 93.001,30.876 U1.17@93.001,29.59 93.001,25.927 C15.2@95.178,23.75 ; U1.84@97.001,50.69 97.001,49.499 ; v1@100.75,48.89 97.61,48.89 97.001,49.499 ; 100.85,39.554 100.934,39.471 102.233,39.471 102.262,39.5 ; 100.904,38.904 100.85,38.85 100.85,33.45 101.91,32.39 U1.39@104.301,32.39 112.363,32.39 C12.2@114.075,30.678 ; 102.461,38.904 102.475,38.89 ; U1.72@104.301,48.89 109.237,48.89 C9.2@109.997,49.65 ; C11.2@109.997,38.375 109.482,38.89 U1.52@104.301,38.89 102.475,38.89 ; C10.2@110.15,43.89 U1.62@104.301,43.89 103.065,43.89 102.435,43.26 102.435,40.635 102.262,40.462 102.262,39.5 ; 91.675,49.175 96.678,49.175 97.001,49.499 ; 102.262,39.5 102.262,39.103 102.475,38.89
  Top Layer w0.356: v1(75.272,37.797) 75.365,37.89 U1.131@83.202,37.89 86.69,37.89 90.025,41.225 94.05,41.225 99.179,41.225 100.85,39.554 100.85,38.85
  Top Layer w0.406: C7.2@88.45,57.197 C8.2@90.975,57.197
  Top Layer w0.508: v1(75.15,33.8) 75.15,31.397 75.475,31.072
  Top Layer w1.27: R146.2@46.453,23.625 47.15,23.625 50.825,19.95 66.025,19.95 69.275,23.2 69.275,27.925 72.422,31.072 75.475,31.072 C14.2@77.1,31.072
  Bottom Layer w0.254: v1(100.75,48.925) v1@106.225,48.925
  Bottom Layer w0.406: v1(89.7,57.175) 89.7,54.1 91.425,52.375 v1(91.55,52.375)
  Bottom Layer w0.508: v1(75.15,33.8) 75.15,47.525 80.05,52.425 v1(84.875,52.425) 87.2,52.425 v1@90.325,49.3
  other v1: 75.275,42.118 106.3,49.05 90.325,49.225
VCC_3.3: C28.2 R4.1 R5.2 U6.8 | length 16.4
  Top Layer w0.508: R4.1@132.128,9.45 133.925,9.45 ; R5.2@134.922,9.45 133.925,9.45 ; C28.2@140.322,17.45 139.952,17.08 U6.8@137.275,17.08 134.93,17.08 133.925,16.075 133.925,9.45
VDDA: C1.2 C2.2 R140.2 U1.33 | length 103
  Top Layer w0.305: U1.33@101.001,29.59 101.001,27.949 101.425,27.525 ; C1.2@109.497,28.2 C1.2@109.997,28.7
  Top Layer w0.406: 101.425,27.525 108.6,27.525 v1(108.7,27.625) 108.922,27.625 C1.2@109.497,28.2
  Top Layer w0.508: C1.2@109.997,28.7 C2.2@109.997,30.375 C2.2@109.997,30.6
  Top Layer w1.016: R140.2@46.403,20.4 46.403,19.472 47.85,18.025 65.55,18.025 70.075,13.5 70.075,6.6 72.95,3.725 94.15,3.725 99.525,9.1 v2(99.525,17.1) v2@99.525,17.15
  Bottom Layer w0.762: v2(99.525,17.1) 100.475,17.1 108.7,25.325 v1(108.7,27.625)
WIFI_RX: P16.1 P17.3 | length 71.2
  Bottom Layer w0.254: P17.3@71.175,64.95 75.675,64.95 78.575,67.85 119,67.85 127.425,59.425 135.525,59.425 136.085,59.985 P16.1@136.085,61.35
WIFI_TX: P16.8 P17.4 | length 64.3
  Bottom Layer w0.254: P17.4@68.635,64.95 68.635,65.11 69.775,66.25 75,66.25 78.475,69.725 122.63,69.725 P16.8@128.465,63.89
pads on no net: LD1. LD2. LD3. LD4. LD5. LD6. LD7. LD8. LD9. LD10. LD11. LD12. LD13. LD14. LD15. LD16. LD17. LD18. LD19. P2.4 P2.6 P2.7 P2.8 P2.9 P5.11 P5.17 P5.19 P16.2 P16.3 U1.6 U1.31 U1.32 U1.106 U5.4 U5.5 U5.6

## Polygon pours and split planes (outlines as drawn)
GND on Bottom Layer "GND" (solid, remove dead copper, pour order 4): 0.005,80 0,79.995 0,0 276,0 276,40 290.125,40 290.3,40.175 290.025,40.45 290.025,79.85
VCC2.5 on Bottom Layer "VCC_2.5" (solid, remove dead copper, pour order 0): 28.125,5.55 30.65,3.025 272.475,3.025 273.45,4 273.45,9 272.45,10 28.15,10 28.125,10.025

## Keep-outs
Keep-Out Layer:
  the board outline again, w0.254

## Other copper
Top Layer:
  rectangle net GND: 230.9,17.9 233.575,21.425
  rectangle net GND: 226.25,18.125 229.075,21.45
  rectangle net VCC3.3: 38.475,19.775 44.725,27.8
  rectangle net VCC: 43.75,31.45 47.125,33.85
  rectangle net VCC: 43.5,45.275 46.8,48.725
  region net USB5V: 34.727,41.457 35.743,42.473 37.65,44.379 37.65,48.975 39.45,48.975 39.45,44.425 36.122,41.097 34.727,41.097
  region net GND: 35.184,38.938 38.425,38.938 38.425,37.075 35.184,37.075
Bottom Layer:
  rectangle net VCC: 43.75,31.3 47.15,48.675
  pour cut-out: 269.65,15.1 274.25,15.1 274.7,14.65 274.7,5.25 273.45,4 269.375,8.075 269.375,14.975 269.525,15.125

## Silkscreen, mask and mechanical layers (free items; w line width, h text height)
Top Overlay:
  lines w0.127: 49.625,2.275 49.625,8.525 ; 49.675,5.575 51.75,5.575 ; 51.825,2.25 51.825,8.5 ; 47.6,2.2 53.65,2.2 53.65,8.55 47.6,8.55 47.6,2.2
  lines w0.203: 57.5,73.354 64.1,73.354 ; 57.5,75.844 64.225,75.844 ; 60.775,70.9 60.775,78.384 ; 66.375,73.354 73.35,73.354 ; 66.425,75.844 73.3,75.844 ; 69.8,70.9 69.8,78.384 ; 57.4,70.789 64.2,70.789 64.2,78.384 57.4,78.384 57.4,70.789 ; 66.325,70.789 66.325,78.384 73.375,78.384 73.375,70.789 66.325,70.789
  text "TX1" at 74.625,76.825 h0.76
  text "RX1" at 77.225,76.825 h0.76
  text "GND" at 82.45,76.825 h0.76
  text "GND" at 79.65,76.775 h0.76
  text "TX1" at 70.375,76.625 h0.76
  text "TX1" at 58.525,76.575 h0.76
  text "RX1" at 61.225,76.55 h0.76
  text "RX1" at 67.475,76.55 h0.76
  text "SWD" at 19.55,75.575 h1.27 r90
  text "GND" at 24.575,75.55 h1.27 r90
  text "CLK" at 22.15,75.5 h1.27 r90
  text "3V3" at 27.075,75.45 h1.27 r90
  text "U_TX" at 61.025,74.175 h1.27
  text "U_RX" at 57.625,74.125 h1.27
  text "W_TX" at 66.475,74.05 h1.27
  text "W_RX" at 70.025,74 h1.27
  text "TX2" at 58.375,71.5 h0.76
  text "RX2" at 61.125,71.5 h0.76
  text "RX2" at 67.4,71.5 h0.76
  text "TX2" at 70.15,71.5 h0.76
  text "LASER_DRIVER_BOARD_01" at 153.425,40.15 h1.52
  text "BT1" at 51.075,6.075 h1.02 r90
  text "GND" at 53.25,4.325 h1.02 r90
  text "3V3" at 49.3,4.275 h1.02 r90
  text "BT0" at 51.05,2.525 h1.02 r90
Bottom Overlay:
  text "USB-WIFI" at 137.925,53.5 h1.52

## Dimensions
45.308,65 to 0.005,80 on Mechanical 1
0.005,80 to 1250.005,79.898 on Mechanical 1
31.008,15 to 0,0 on Mechanical 1

## Text inside footprints (layer, text, board x,y; h text height)
LD1: Bottom Overlay "+" at 31.651,14.619 h1.52 r270; Bottom Overlay "PD" at 29.619,12.46 h0.8 r270; Bottom Overlay "-" at 29.619,16.905 h1.52 r270
LD2: Bottom Overlay "+" at 44.681,66.651 h1.52; Bottom Overlay "PD" at 46.84,64.619 h0.8; Bottom Overlay "-" at 42.395,64.619 h1.52
LD3: Bottom Overlay "-" at 53.981,13.095 h1.52 r90; Bottom Overlay "PD" at 53.981,17.54 h0.8 r90; Bottom Overlay "+" at 51.949,15.381 h1.52 r90
LD4: Bottom Overlay "+" at 75.549,15.381 h1.52 r90; Bottom Overlay "PD" at 77.581,17.54 h0.8 r90; Bottom Overlay "-" at 77.581,13.095 h1.52 r90
LD5: Bottom Overlay "-" at 84.595,64.619 h1.52; Bottom Overlay "PD" at 89.04,64.619 h0.8; Bottom Overlay "+" at 86.881,66.651 h1.52
LD6: Bottom Overlay "-" at 100.419,16.905 h1.52 r270; Bottom Overlay "PD" at 100.419,12.46 h0.8 r270; Bottom Overlay "+" at 102.451,14.619 h1.52 r270
LD7: Bottom Overlay "+" at 115.481,66.651 h1.52; Bottom Overlay "PD" at 117.64,64.619 h0.8; Bottom Overlay "-" at 113.195,64.619 h1.52
LD8: Bottom Overlay "+" at 124.781,16.651 h1.52; Bottom Overlay "PD" at 126.94,14.619 h0.8; Bottom Overlay "-" at 122.495,14.619 h1.52
LD9: Bottom Overlay "-" at 146.095,14.619 h1.52; Bottom Overlay "PD" at 150.54,14.619 h0.8; Bottom Overlay "+" at 148.381,16.651 h1.52
LD10: Bottom Overlay "-" at 155.395,64.619 h1.52; Bottom Overlay "PD" at 159.84,64.619 h0.8; Bottom Overlay "+" at 157.681,66.651 h1.52
LD11: Bottom Overlay "+" at 171.981,16.651 h1.52; Bottom Overlay "PD" at 174.14,14.619 h0.8; Bottom Overlay "-" at 169.695,14.619 h1.52
LD12: Bottom Overlay "+" at 183.681,66.651 h1.52; Bottom Overlay "PD" at 185.84,64.619 h0.8; Bottom Overlay "-" at 181.395,64.619 h1.52
LD13: Bottom Overlay "-" at 193.295,14.619 h1.52; Bottom Overlay "PD" at 197.74,14.619 h0.8; Bottom Overlay "+" at 195.581,16.651 h1.52
LD14: Bottom Overlay "-" at 207.595,64.619 h1.52; Bottom Overlay "PD" at 212.04,64.619 h0.8; Bottom Overlay "+" at 209.881,66.651 h1.52
LD15: Bottom Overlay "+" at 219.181,16.651 h1.52; Bottom Overlay "PD" at 221.34,14.619 h0.8; Bottom Overlay "-" at 216.895,14.619 h1.52
LD16: Bottom Overlay "-" at 240.495,14.619 h1.52; Bottom Overlay "PD" at 244.94,14.619 h0.8; Bottom Overlay "+" at 242.781,16.651 h1.52
LD17: Bottom Overlay "+" at 252.081,66.651 h1.52; Bottom Overlay "PD" at 254.24,64.619 h0.8; Bottom Overlay "-" at 249.795,64.619 h1.52
LD18: Bottom Overlay "+" at 266.381,16.651 h1.52; Bottom Overlay "PD" at 268.54,14.619 h0.8; Bottom Overlay "-" at 264.095,14.619 h1.52
LD19: Bottom Overlay "-" at 278.395,64.619 h1.52; Bottom Overlay "PD" at 282.84,64.619 h0.8; Bottom Overlay "+" at 280.681,66.651 h1.52
P6: Top Overlay "39" at 251.7,20.2 h1 r270; Top Overlay "40" at 262.1,20.4 h1 r270; Top Overlay "2" at 262.4,60.1 h1 r270; Top Overlay "1" at 251.7,59.9 h1 r270
P7: Top Overlay "1" at 236.3,20.1 h1 r90; Top Overlay "2" at 225.6,19.9 h1 r90; Top Overlay "40" at 225.9,59.6 h1 r90; Top Overlay "39" at 236.3,59.8 h1 r90
P16: Bottom Overlay "RX" at 135.45,66.811 h1.52 r180; Bottom Overlay "IO0" at 132.402,66.811 h1.52 r180; Bottom Overlay "IO2" at 129.481,66.811 h1.52 r180; Bottom Overlay "GND" at 126.179,66.811 h1.52 r180; Bottom Overlay "TX" at 126.433,68.843 h1.52 r180; Bottom Overlay "3.3V" at 135.45,68.843 h1.52 r180; Bottom Overlay "EN" at 129.481,68.843 h1.52 r180; Bottom Overlay "RST" at 132.275,68.843 h1.52 r180